# EAGLE board basis (EAGLE 6.6.0)
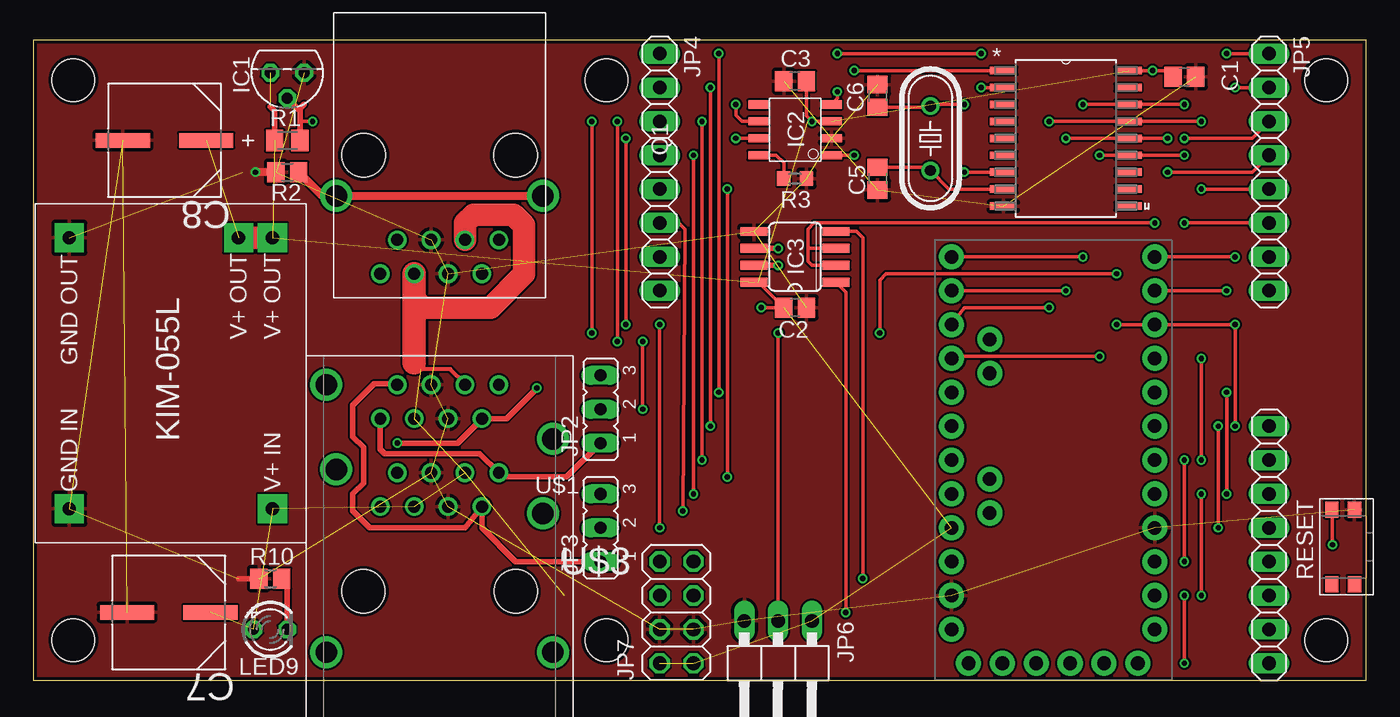
[diagram p0: board, top side]
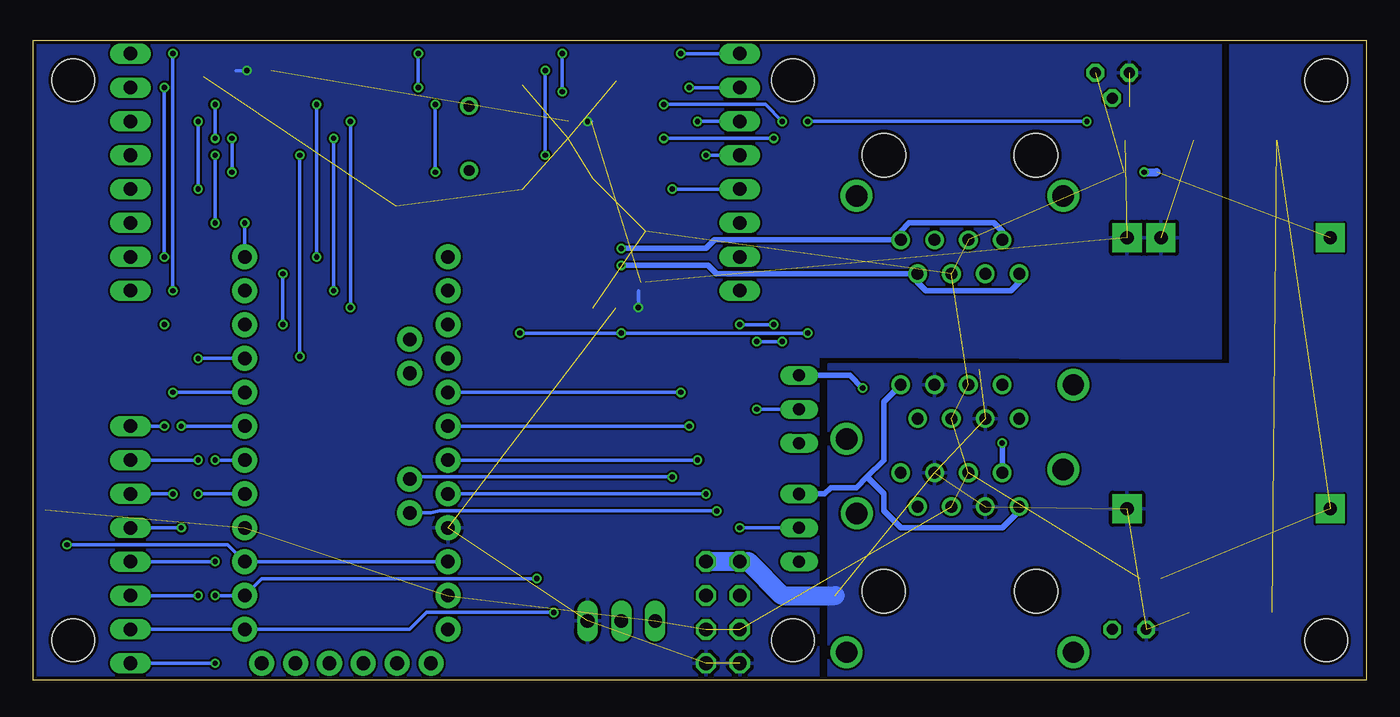
[diagram p1: board, bottom side, seen from below]

Size 100 x 48 mm. Coordinates in mm from the lower left corner, seen from the top.
Outline: 0,0 100,0 100,48 0,48 0,0
Copper layers (1*16): Top 0.035mm / dielectric 1.5mm / Bottom 0.035mm
Design rules "ITEADstudio_DRC": minimum track width 6mil, minimum drill 12mil, track to track 6mil, track to pad 6mil, pad to pad 6mil, via to via 6mil, smd to smd 0mil, copper to edge 10mil, drill to drill 10mil, minimum pad ring 10mil, minimum via ring 6mil, stop-mask expansion 2mil, vias tented up to drill 100mil, thermal gap 10mil
Net classes: 4 USBpair: width 0.254 mm, drill 0.406 mm, clearance 0.508 mm
Holes 3.2 mm at 3,3 3,45 97,45 97,3 43,45 43,3

## Footprints (pad centres in the part's own frame; a part is rotated, then mirrored left to right if it is on the bottom)
C0805 = smd 1.3 x 1.5: 1 -0.85,0; 2 0.85,0
CAPAE830X1050N = smd 4.064 x 1.092: 1 -3.124,0; 2 3.124,0
MEBP = drill 0.9: 1 -4.445,6.35; 2 -3.175,8.89; 3 -1.9,6.35; 4 -0.635,8.89; 5 0.635,6.35; 6 1.9,8.89; 7 3.175,6.35; 8 4.445,8.89 | drill 1.6: T1 -7.75,3.05; T2 7.75,3.05 | hole 3.3: -5.7,0; 5.7,0
TO-92 = drill 0.813 pad 1.27 octagon: 1 -1.27,0; 2 0,1.905; 3 1.27,0
SO-8 = smd 0.61 x 1.524: 1 0,-0.203; 2 1.27,-0.203; 3 2.54,-0.203; 4 3.81,-0.203; 5 3.81,5.283; 6 2.54,5.283; 7 1.27,5.283; 8 0,5.283
SO08 = smd 0.66 x 2.032: 1 -1.905,-3.073; 2 -0.635,-3.073; 3 0.635,-3.073; 4 1.905,-3.073; 5 1.905,3.073; 6 0.635,3.073; 7 -0.635,3.073; 8 -1.905,3.073
1X08 = drill 1.016 long: 1 -8.89,0; 2 -6.35,0; 3 -3.81,0; 4 -1.27,0; 5 1.27,0; 6 3.81,0; 7 6.35,0; 8 8.89,0
JP2 = drill 0.914 long: 1 -2.54,0; 2 0,0; 3 2.54,0
1X03/90 = drill 1.016 long: 1 -2.54,-3.81; 2 0,-3.81; 3 2.54,-3.81
2X04 = drill 1.016 octagon: 1 -3.81,-1.27; 2 -3.81,1.27; 3 -1.27,-1.27; 4 -1.27,1.27; 5 1.27,-1.27; 6 1.27,1.27; 7 3.81,-1.27; 8 3.81,1.27
615016240521 = drill 0.89: A1 -4.445,-1.27; A2 -3.175,1.27; A3 -1.905,-1.27; A4 -0.635,1.27; A5 0.635,-1.27; A6 1.905,1.27; A7 3.175,-1.27; A8 4.445,1.27; B1 4.445,7.87; B2 3.175,5.33; B3 1.905,7.87; B4 0.635,5.33; B5 -0.635,7.87; B6 -1.905,5.33; B7 -3.175,7.87; B8 -4.445,5.33 | drill 1.6: Z1 -8.505,-12.19; Z2 8.505,-12.19; Z3 7.745,-1.78; Z4 -7.745,1.52; Z5 8.505,3.81; Z6 -8.505,7.87 | hole 3.25: -5.715,-7.62; 5.715,-7.62
LED3MM = drill 0.813 octagon: A -1.27,0; K 1.27,0
KIM-055L = drill 1 pad 2.184 square: GNDIN -10.16,7.62; GNDOUT 10.16,7.62; V+IN -10.16,-7.62; V+OUT1 10.16,-5.08; V+OUT2 10.16,-7.62
HC49/S = drill 0.813: 1 -2.413,0; 2 2.413,0
M0805 = smd 1.3 x 1.6: 1 -0.95,0; 2 0.95,0
R0805 = smd 1.3 x 1.5: 1 -0.85,0; 2 0.85,0
R0603 = smd 1 x 1.1: 1 -0.85,0; 2 0.85,0
434351045816 = smd 1.2 x 1: 1 2.8,0.85; 2 2.8,-0.85; 3 -2.8,0.85; 4 -2.8,-0.85
ARDUINO_PRO_MINI = drill 1.016 pad 1.88: 1 -7.62,12.7; 2 -7.62,10.16; 3 -7.62,7.62; 4 -7.62,5.08; 5 -7.62,2.54; 6 -7.62,0; 7 -7.62,-2.54; 8 -7.62,-5.08; 9 -7.62,-7.62; 10 -7.62,-10.16; 11 -7.62,-12.7; 12 -7.62,-15.24; 13 7.62,-15.24; 14 7.62,-12.7; 15 7.62,-10.16; 16 7.62,-7.62; 17 7.62,-5.08; 18 7.62,-2.54; 19 7.62,0; 20 7.62,2.54; 21 7.62,5.08; 22 7.62,7.62; 23 7.62,10.16; 24 7.62,12.7; A4 4.763,1.429; A5 4.763,3.969; A6 4.763,-9.049; A7 4.763,-6.509; BLK -6.35,15.24; GND -3.81,15.24; GRN 6.35,15.24; RXI 1.27,15.24; TXO 3.81,15.24; VCC -1.27,15.24
SOIC127P1034X264-18N = smd 1.981 x 0.559: 1 -4.699,5.08; 2 -4.699,3.81; 3 -4.699,2.54; 4 -4.699,1.27; 5 -4.699,0; 6 -4.699,-1.27; 7 -4.699,-2.54; 8 -4.699,-3.81; 9 -4.699,-5.08; 10 4.699,-5.08; 11 4.699,-3.81; 12 4.699,-2.54; 13 4.699,-1.27; 14 4.699,0; 15 4.699,1.27; 16 4.699,2.54; 17 4.699,3.81; 18 4.699,5.08

## Placement (x,y rotation side)
C1  [C0805]  86.36,45.24 0 top
C2  [C0805]  57.15,27.94 0 top
C3  [C0805]  57.15,44.93 180 top
C5  [C0805]  63.34,37.62 270 top
C6  [C0805]  63.34,43.81 90 top
C7  100UF  [CAPAE830X1050N]  10.16,5.08 180 top
C8  100UF  [CAPAE830X1050N]  9.84,40.48 180 top
CON1  [MEBP]  30.48,39.37 180 top
IC1  DS1820TO92  [TO-92]  19.05,45.56 180 top
IC2  MCP2551  [SO-8]  59.69,39.37 90 top
IC3  MAX481CSA  [SO08]  57.15,31.75 90 top
JP1  [1X08]  92.71,10.16 90 top
JP2  [JP2]  42.55,20.32 90 top
JP3  [JP2]  42.55,11.43 90 top
JP4  [1X08]  46.99,38.1 270 top
JP5  [1X08]  92.71,38.1 270 top
JP6  [1X03/90]  55.88,0.64 180 top
JP7  [2X04]  48.26,5.08 90 top
K4  615016240521  [615016240521]  30.48,14.29 0 top
LED9  [LED3MM]  17.78,3.81 0 top
MOD1  [KIM-055L]  10.32,23.02 90 top
Q1  [HC49/S]  67.31,40.64 90 top
R1  [M0805]  19.05,40.48 180 top
R2  [R0805]  19.05,38.1 0 top
R3  10k  [R0603]  57.15,37.62 0 top
R10  [R0805]  17.78,7.62 0 top
RESET  434351045816  [434351045816]  98.27,10 90 top
U$1  ARDUINO_PRO_MINI  [ARDUINO_PRO_MINI]  76.52,16.51 180 top
U$3  MCP2515-I/SO  [SOIC127P1034X264-18N]  77.47,40.64 0 top

## Library data of the parts
C1-C3 C5 C6 R1 R2 R10 = schlager_passiv
C7 C8 = PASSIV_Panasonic-EEEFK_EEEFP; MPN: EEE-FK1V101P; OC_FARNELL: 9695869; OC_NEWARK: 82K7638; PACKAGE: CASE-F; SUPPLIER: PANASONIC; TOLERANCE: ±20 %; VOLTAGERATING: 35V
CON1 = myconn
IC1 = schlager_ics
IC2 = MYMCHIP
IC3 = maxim; MF: MAXIM; MPN: MAX481CSA; OC_FARNELL: unknown; OC_NEWARK: 90C3817
JP1 JP4-JP7 = pinhead
JP2 JP3 = jumper
K4 = Wuerth_Elektronik_eiCan_Communication_Connectors
LED9 = led
MOD1 = kim055l
Q1 = crystal; OC_FARNELL: 1667008; OC_NEWARK: unknown
R3 = rcl
RESET = Illuminated_Switches
U$1 = SparkFun-Boards
U$3 = schlager_ics; MPN: MCP2515-I/SO; OC_FARNELL: 1292239; OC_NEWARK: 29H7136; PACKAGE: SOIC-18; SUPPLIER: Microchip

## Nets
1W: IC1.2 JP1.8 JP6.2 R1.1 U$1.10
A0: JP4.1 U$1.17
A1: JP4.2 U$1.18
A2: JP4.3 U$1.19
A3: JP4.4 U$1.20
A4_SDA: JP4.5 U$1.A4
A5_SCL: JP4.6 U$1.A5
A6: U$1.A6
A7: U$1.A7
CANH: IC2.7 JP3.2
CANH1: JP3.3 K4.A1 K4.B1
CANH2: JP3.1 K4.A7 K4.B7
CANL: IC2.6 JP2.2
CANL1: JP2.3 K4.A2 K4.B2
CANL2: JP2.1 K4.A8 K4.B8
CANRX: IC2.4 U$3.2
CANTX: IC2.1 U$3.1
D2: JP1.3 U$1.5
D3: JP1.4 U$1.6
D4: JP1.5 U$1.7
D5: JP1.6 U$1.8
D6: JP1.7 U$1.9
D8_SS: JP5.1 U$1.11
D9_SS: IC3.2 IC3.3 JP5.2 U$1.12
D10_SS: JP5.3 U$1.13 U$3.16
D11_MOSI: JP5.4 U$1.14 U$3.14
D12_MISO: JP5.5 U$1.15 U$3.15
D13_SCK: JP5.6 U$1.16 U$3.13
GND: C1.2 C2.2 C3.2 C5.2 C6.2 C7.2 C8.2 CON1.4 CON1.5 IC1.1 IC2.2 IC3.5 JP6.3 JP7.3 JP7.4 K4.A4 K4.A5 K4.B4 K4.B5 MOD1.GNDIN MOD1.GNDOUT R2.1 R3.2 R10.1 RESET.2 U$1.4 U$1.23 U$3.9
MCP_OSC1: C5.1 Q1.1 U$3.8
MCP_OSC2: C6.1 Q1.2 U$3.7
N$2: IC2.8 R3.1
N$3: CON1.T1 CON1.T2 R2.2
N$9: LED9.K R10.2
P5V: C1.1 C2.1 C3.1 C8.1 IC1.3 IC2.3 IC3.8 JP6.1 JP7.1 JP7.2 MOD1.V+OUT1 MOD1.V+OUT2 R1.2 U$1.21 U$3.18
P24P: C7.1 CON1.3 CON1.6 JP7.7 JP7.8 K4.A3 K4.A6 K4.B3 K4.B6 LED9.A MOD1.V+IN
RESERVE: JP5.7
RESERVE2: JP5.8
RESET: RESET.1 U$1.3 U$1.22
RS485_A: CON1.1 CON1.7 IC3.6
RS485_B: CON1.2 CON1.8 IC3.7
RX: IC3.4 JP1.1 U$1.2
TX: IC3.1 JP1.2 U$1.1

## Tracks (layer width: path | path; a pad name or v marks a point on that pad's centre or on a via)
1W  (via drill 0.4)
  Top 0.254: v81.28,30.48 63.98,30.48 63.5,30 v63.5,26.04 | v41.91,26.04 v41.91,41.91 | v20.95,41.91 20,41.91 | JP6.2 v55.88,26.04 | v90.17,19.05 v90.17,26.67 U$1.10 v81.28,26.67
  Top 0.406: R1.1 20,41.91 20,42.71 19.92,42.78 | 19.92,42.78 IC1.2 | 20.32,43.18 19.92,42.78
  Bottom 0.254: v81.28,26.67 v81.28,30.48 | v63.5,26.04 v55.88,26.04 v41.91,26.04 | v41.91,41.91 v20.95,41.91 | JP1.8 v90.17,19.05
A0  (via drill 0.4)
  Top 0.254: v51.44,46.99 v51.44,21.59
  Bottom 0.254: JP4.1 v51.44,46.99 | U$1.17 v51.44,21.59
A1  (via drill 0.4)
  Top 0.254: v50.8,19.05 v50.8,44.45
  Bottom 0.254: U$1.18 v50.8,19.05 | v50.8,44.45 JP4.2
A2  (via drill 0.4)
  Top 0.254: v50.16,16.51 v50.16,41.91
  Bottom 0.254: U$1.19 v50.16,16.51 | v50.16,41.91 JP4.3
A3  (via drill 0.4)
  Top 0.254: v49.53,13.97 v49.53,39.37
  Bottom 0.254: U$1.20 v49.53,13.97 | v49.53,39.37 JP4.4
A4_SDA  (via drill 0.4)
  Top 0.254: v52.07,36.83 v52.07,15.24
  Bottom 0.254: JP4.5 v52.07,36.83 | v52.07,15.24 71.28,15.24 U$1.A4
A5_SCL  (via drill 0.4)
  Top 0.254: v48.74,12.7 48.9,33.81 48.42,34.29 JP4.6
  Bottom 0.254: U$1.A5 70.17,12.54 69.53,12.7 v48.74,12.7
CANH  (via drill 0.4)
  Top 0.254: v46.99,11.43 v46.99,26.67 | v44.45,26.67 v44.45,40.64 | v52.7,40.64 IC2.7
  Bottom 0.254: JP3.2 v46.99,11.43 | v46.99,26.67 v44.45,26.67 | v44.45,40.64 v52.7,40.64
CANH1
  Bottom 0.406: 37.47,15.24 38.26,14.45 40.16,14.45 40.64,13.97 JP3.3 | 37.47,15.24 36.2,16.51 36.2,20.89 K4.B1 | K4.A1 26.04,12.7 27.3,11.43 34.92,11.43 36.2,12.7 36.2,13.97 37.47,15.24
CANH2
  Top 0.406: K4.B7 27.24,22.23 25.56,22.23 23.97,20.64 23.97,18.26 24.77,17.46 24.77,14.76 23.97,13.97 23.97,12.7 25.24,11.43 32.38,11.43 K4.A7 33.66,11.43 36.2,8.89 JP3.1
CANL  (via drill 0.4)
  Top 0.254: IC2.6 53.18,41.91 52.7,42.39 v52.7,43.18 | v43.81,41.91 v43.81,25.4 | v45.72,25.4 v45.72,20.32
  Bottom 0.254: v43.81,25.4 v45.72,25.4 | v45.72,20.32 JP2.2 | v52.7,43.18 45.09,43.18 v43.81,41.91
CANL1  (via drill 0.4)
  Top 0.406: v27.3,17.78 31.82,17.78 K4.B2 35.49,19.62 v37.78,21.91
  Bottom 0.406: K4.A2 v27.3,17.78 | JP2.3 38.73,22.86 v37.78,21.91
CANL2
  Top 0.406: K4.B8 26.04,17.3 26.35,16.99 33.5,16.99 K4.A8 35.24,15.24 40.01,15.24 JP2.1
CANRX  (via drill 0.4)
  Top 0.254: IC2.4 59.89,43.22 60.33,43.66 v60.33,44.13 | v60.33,46.99 v71.12,46.99 | v71.12,44.45 U$3.2
  Bottom 0.254: v60.33,44.13 v60.33,46.99 | v71.12,46.99 v71.12,44.45
CANTX  (via drill 0.4)
  Top 0.254: U$3.1 v61.59,45.72 | v61.59,39.37 IC2.1
  Bottom 0.254: v61.59,45.72 v61.59,39.37
D2  (via drill 0.4)
  Top 0.254: v87.63,6.35 v87.63,13.97
  Bottom 0.254: JP1.3 v87.63,6.35 | v87.63,13.97 U$1.5
D3  (via drill 0.4)
  Top 0.254: v86.36,8.89 v86.36,16.51
  Bottom 0.254: JP1.4 v86.36,8.89 | v86.36,16.51 U$1.6
D4  (via drill 0.4)
  Top 0.254: v88.9,11.43 v88.9,19.05
  Bottom 0.254: JP1.5 v88.9,11.43 | v88.9,19.05 U$1.7
D5  (via drill 0.4)
  Top 0.254: v89.53,13.97 v89.53,21.59
  Bottom 0.254: JP1.6 v89.53,13.97 | v89.53,21.59 U$1.8
D6  (via drill 0.4)
  Top 0.254: v87.63,16.51 v87.63,24.13
  Bottom 0.254: JP1.7 v87.63,16.51 | v87.63,24.13 U$1.9
D8_SS  (via drill 0.4)
  Top 0.254: U$1.11 v89.53,29.21 | v89.53,46.99 JP5.1
  Bottom 0.254: v89.53,29.21 v89.53,46.99
D9_SS  (via drill 0.4)
  Top 0.254: JP5.2 v90.17,44.45 | v90.17,31.75 U$1.12 | v84.14,34.29 58.58,34.29 58.1,33.81 58.1,32.38 | 58.1,32.38 58.1,31.43 58.42,31.11 IC3.2 | IC3.3 58.1,32.38
  Bottom 0.254: v90.17,44.45 v90.17,31.75 | U$1.12 v84.14,34.29
D10_SS  (via drill 0.4)
  Top 0.254: v86.36,43.18 U$3.16 v78.74,43.18 | v78.74,31.75 U$1.13 | v86.36,40.64 91.44,40.64 JP5.3
  Bottom 0.254: v86.36,40.64 v86.36,43.18 | v78.74,43.18 v78.74,31.75
D11_MOSI  (via drill 0.4)
  Top 0.254: v85.09,40.64 U$3.14 v77.47,40.64 | v77.47,29.21 U$1.14 | v85.09,38.1 91.44,38.1 JP5.4
  Bottom 0.254: v85.09,38.1 v85.09,40.64 | v77.47,40.64 v77.47,29.21
D12_MISO  (via drill 0.4)
  Top 0.254: JP5.5 v87.63,36.83 | v87.63,41.91 U$3.15 v76.2,41.91 | v76.2,27.94 69.85,27.94 U$1.15
  Bottom 0.254: v87.63,36.83 v87.63,41.91 | v76.2,41.91 v76.2,27.94
D13_SCK  (via drill 0.4)
  Top 0.254: v86.36,39.37 U$3.13 v80.01,39.37 | v86.36,34.29 JP5.6 | U$1.16 69.22,24.29 v80.01,24.29
  Bottom 0.254: v86.36,39.37 v86.36,34.29 | v80.01,24.29 v80.01,39.37
GND  (via drill 0.4)  (27 unrouted)
  Top 0.406: R10.1 15.4,7.62
  Top 0.61: R2.1 v16.67,38.1
  Bottom 0.61: v16.67,38.1 15.72,38.1
  pour Top: -8.89,72.39 120.65,72.39 120.65,-13.97 -8.89,-13.97
MCP_OSC1
  Top 0.254: U$3.8 68.71,36.83 Q1.1 67.06,38.47 C5.1
MCP_OSC2  (via drill 0.4)
  Top 0.254: C6.1 67.22,42.97 Q1.2 67.44,43.18 v69.85,43.18 | U$3.7 v69.85,38.1
  Bottom 0.254: v69.85,38.1 v69.85,43.18
N$2
  Top 0.254: R3.1 56.3,38.79 55.72,39.37 IC2.8
N$3
  Top 0.61: R2.2 21.68,36.32 CON1.T2 CON1.T1
N$9
  Top 0.406: LED9.K 19.05,7.2 R10.2
P5V  (via drill 0.4)  (10 unrouted)
  Top 0.254: IC3.8 54.4,29.84 C2.1 v54.61,27.94 | C1.1 85.03,45.72 v83.98,45.72 U$3.18 | IC2.3 v58.42,41.91 58,42.33 C3.1
  Top 0.406: R1.2 18.1,42.7 17.78,43.02
  Top 1.676: MOD1.V+OUT1 MOD1.V+OUT2
  Bottom 0.254: v54.61,27.94 54.61,29.21 | v83.98,45.72 84.77,45.72 | v58.42,41.91 58.1,41.91
  pour Bottom (rank 5): 10.95,68.58 109.22,68.58 109.22,-13.97 41.12,-13.81 41.12,24.29 10.95,24.13
P24P  (7 unrouted)
  Top 0.305: K4.B3 32.38,22.23 31.27,23.34 29.05,23.34 28.57,23.81
  Top 1.676: CON1.6 28.58,28.57 29.21,27.94 34.29,27.94 36.83,30.48 36.83,34.13 36.04,34.92 33.02,34.92 32.38,34.29 CON1.3
  Top 1.778: CON1.6 28.58,23.82 28.57,23.81
  Bottom 1.422: JP7.7 JP7.8 46.35,8.89 43.81,6.35 39.85,6.35
  pour Bottom (rank 5): -16.51,68.58 10.16,68.58 10.16,23.65 40.32,23.65 40.32,-15.24 -16.51,-15.24
RESET  (via drill 0.4)
  Top 0.254: v97.47,10.16 97.47,12.74 RESET.1
  Bottom 0.254: v97.47,10.16 85.41,10.16 U$1.3 U$1.22
RS485_A  (via drill 0.4)
  Top 0.406: IC3.6 v55.88,32.38
  Bottom 0.406: CON1.7 27.3,33.66 27.94,34.29 34.29,34.29 34.92,33.66 CON1.1 48.9,33.02 49.53,32.38 v55.88,32.38
RS485_B  (via drill 0.4)
  Top 0.406: IC3.7 v55.88,31.11
  Bottom 0.406: CON1.8 26.04,29.84 26.67,29.21 33.02,29.21 33.66,29.84 CON1.2 48.74,30.48 49.37,31.11 v55.88,31.11
RX  (via drill 0.4)
  Top 0.254: IC3.4 61.75,33.66 62.23,33.18 v62.23,7.62 | v86.36,1.27 v86.36,6.35
  Bottom 0.254: v62.23,7.62 82.87,7.62 U$1.2 v86.36,6.35 | JP1.1 v86.36,1.27
TX  (via drill 0.4)
  Top 0.254: v60.96,5.08 60.96,29.11 IC3.1
  Bottom 0.254: JP1.2 U$1.1 71.75,3.81 70.48,5.08 v60.96,5.08